# Altium PCB PCB.PcbDoc
Units mm, origin at the board's own origin, x right, y up, seen from the top; angles counter-clockwise.
Board outline 50 x 50 mm, 2 copper layers (Top Layer, Bottom Layer); 29 components, 15 nets, 81 pads, 7 vias.
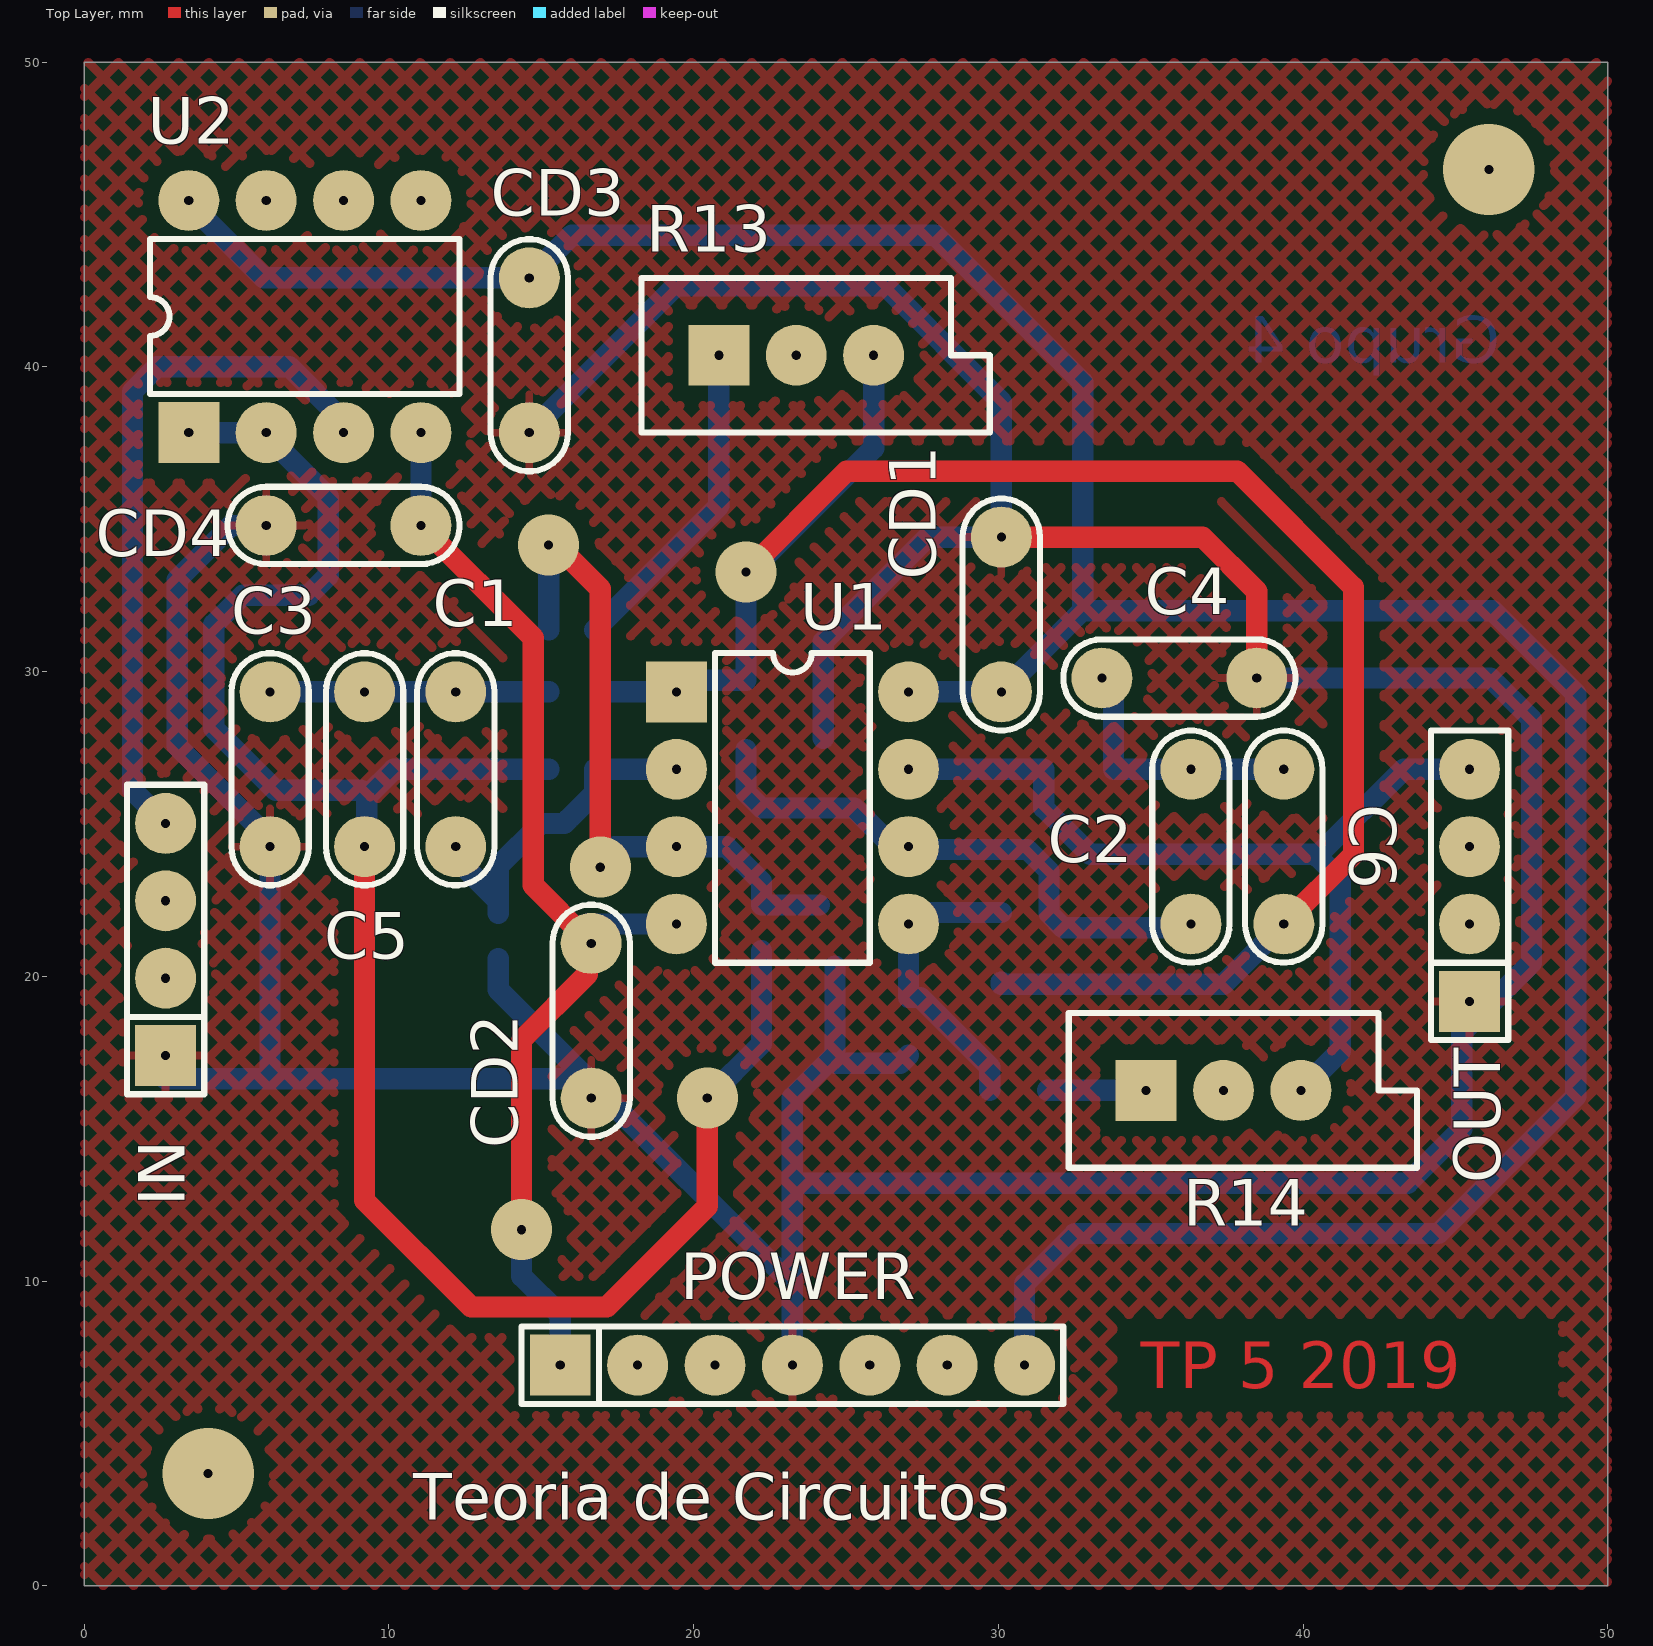
[diagram p0: Top Layer view]
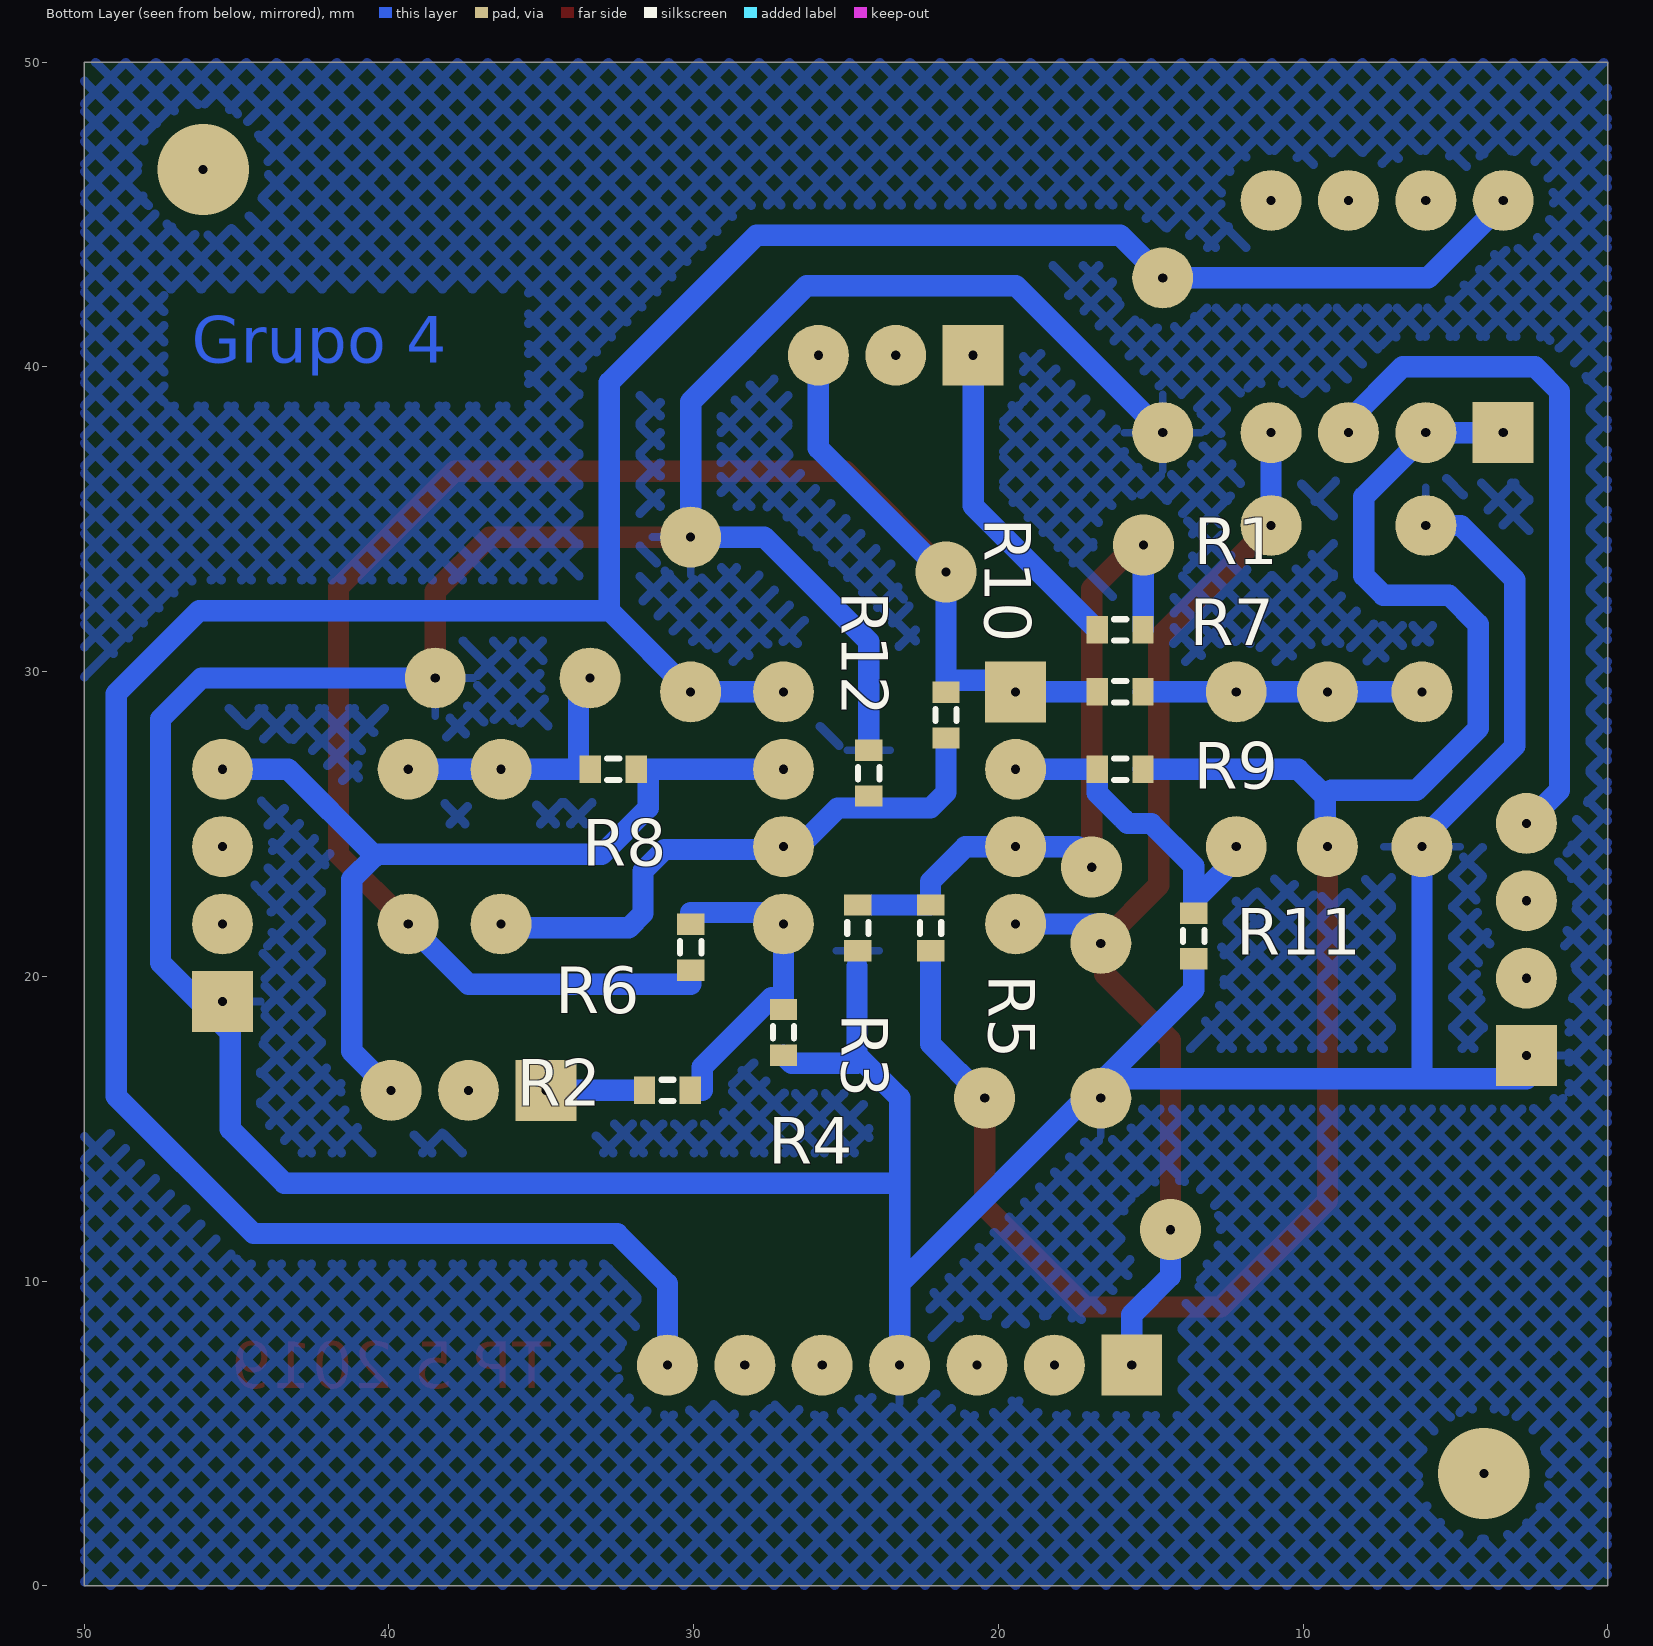
[diagram p1: Bottom Layer view, seen from below]
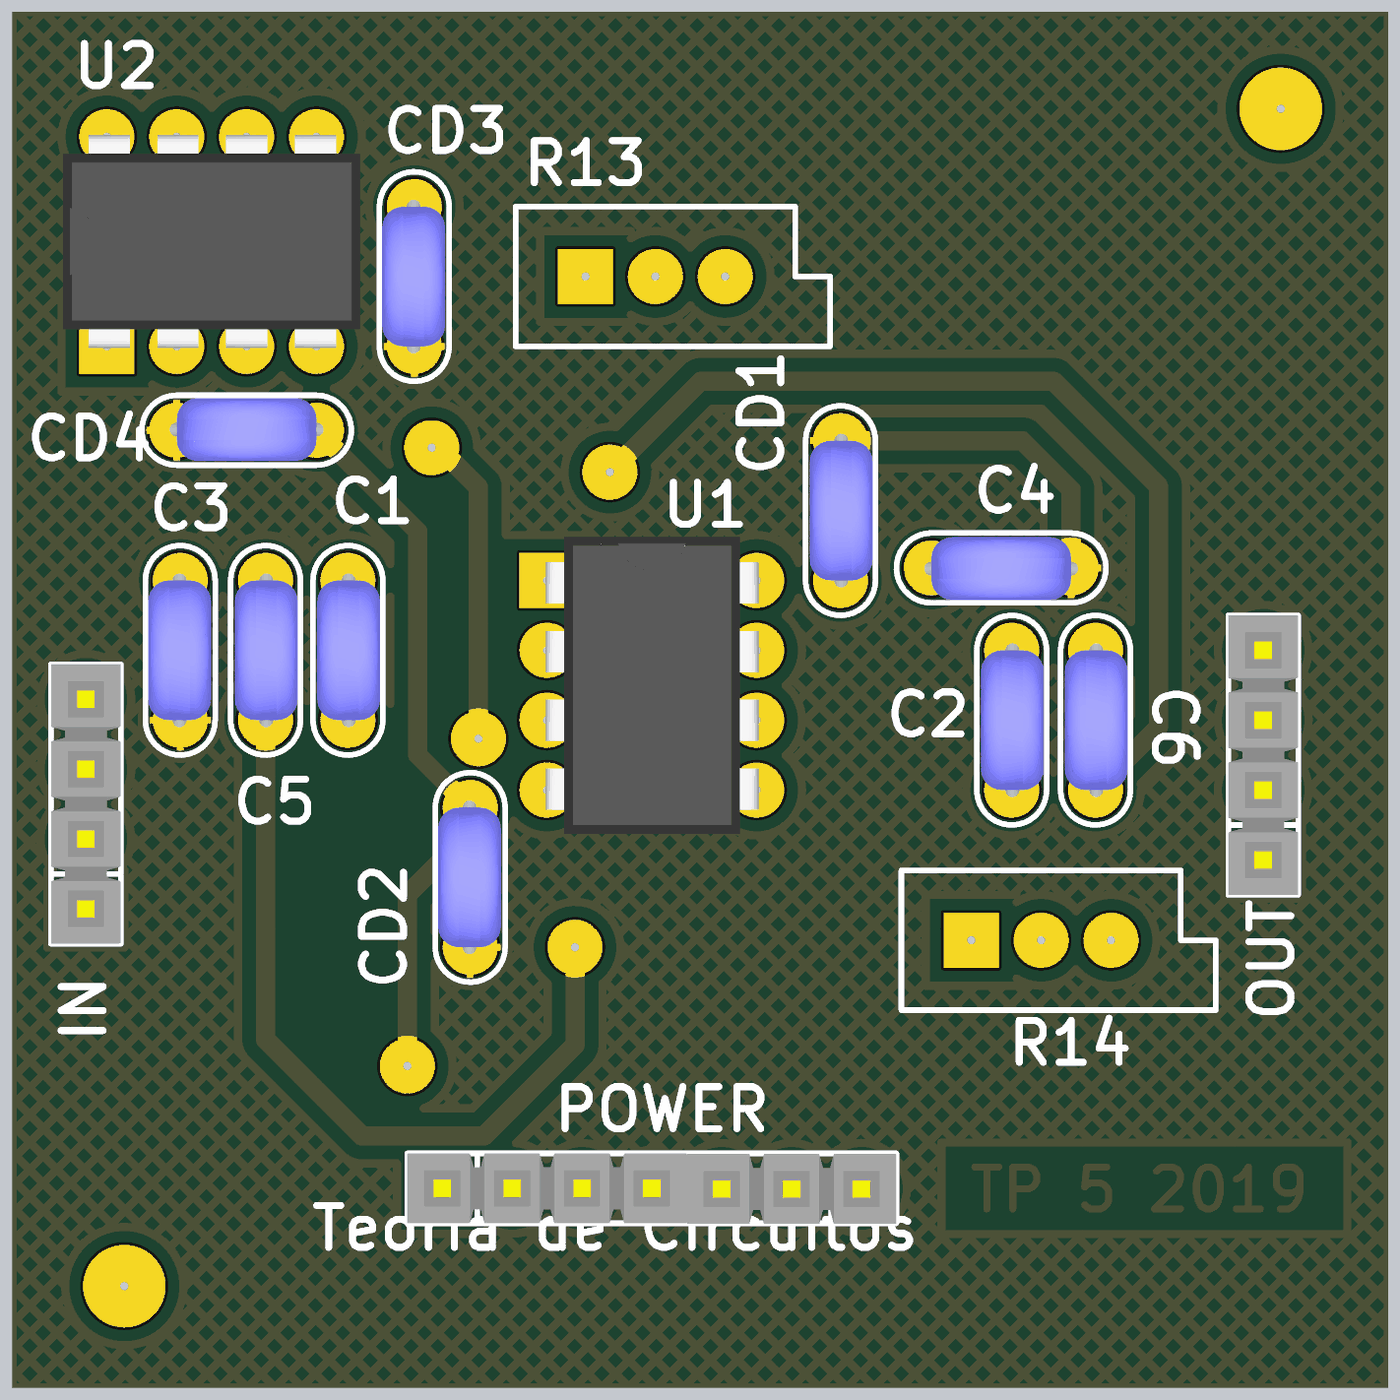
[diagram p2: 3D render of the assembled board from above, using the file's embedded part models]

## Layer stack, top to bottom
Top Solder: solder mask 0.0102, Solder Resist, Dk 3.5
Top Layer: signal copper 0.0356
Dielectric 1: dielectric 0.32, FR-4, Dk 4.8
Bottom Layer: signal copper 0.0356
Bottom Solder: solder mask 0.0102, Solder Resist, Dk 3.5

## Board outline
0,0 50,0 50,50 0,50

## Design rules (kind name [scope] priority, off if disabled: settings)
Clearance [All] p1: gap=0.5 ignorepadtopadclearanceinfootprint=FALSE
PolygonConnect [All] p1: connectstyle=Relief reliefconductorwidth=0.254 reliefentries=4 polygonreliefangle="90 Angle" airgapwidth=0.254
RoutingVias [All] p1: holewidth=0.3 width=2 viastyle="Through Hole" minholewidth=0.3 minwidth=2 maxholewidth=0.3 maxwidth=2
SolderMaskExpansion [All] p1: expansion=0.102
Width [All] p1: maxlimit=0.7 minlimit=0.7 preferedwidth=0.7 minimp=50.000000 maximp=50.000000 favimp=50.000000
30 further rules are at their usual default settings.

## Components (designator, comment, footprint, x,y, rotation, side; value= is the part's Value field where it differs from the comment)
C1 "CAP" CAP200 12.192,26.797 r90 top
C2 "CAP" CAP200 36.322,24.257 r90 top
C3 "CAP" CAP200 6.096,26.797 r270 top
C4 "CAP" CAP200 35.941,29.791 r0 top
C5 "CAP" CAP200 9.198,26.797 r90 top
C6 "CAP" CAP200 39.37,24.257 r90 top
CD1 "10n" CAP200 30.099,31.877 r90 top
CD2 "10n" CAP200 16.637,18.542 r270 top
CD3 "10n" CAP200 14.605,40.386 r270 top
CD4 "10n" CAP200 8.509,34.798 r180 top
IN "CON4" SIP4 2.667,21.209 r90 top
OUT "CON4" SIP4 45.466,22.987 r90 top
POWER "CON7" SIP7 15.621,7.239 r0 top
R1 "Res3" J1-0603 16.002,31.369 r0 bottom
R2 "Res3" J1-0603 30.861,16.256 r0 bottom
R3 "Res3" J1-0603 24.61,21.59 r90 bottom
R4 "Res3" J1-0603 27.051,18.161 r90 bottom
R5 "Res3" J1-0603 22.225,21.59 r90 bottom
R6 "Res3" J1-0603 30.099,20.955 r90 bottom
R7 "Res3" J1-0603 16.002,29.337 r0 bottom
R8 "Res3" J1-0603 32.639,26.797 r180 bottom
R9 "Res3" J1-0603 16.002,26.797 r0 bottom
R10 "Res3" J1-0603 21.717,28.575 r270 bottom
R11 "Res3" J1-0603 13.589,21.324 r90 bottom
R12 "Res3" J1-0603 24.257,26.67 r270 bottom
R13 "RPot" VR5 23.368,40.386 r0 top value=1K
R14 "RPot" VR5 37.392,16.256 r0 top value=1K
U1 "TL082" DIP8 19.431,29.337 r0 top
U2 "TL082" DIP8 3.429,37.846 r90 top

## Footprints (in the part's own frame and the unit in brackets; to place one, negate y for a bottom-side part, rotate by r counter-clockwise, add the part's x,y. Pads: shape width x height; smd on the part's side, far side on the other; paste and mask are expansions set on the pad)
CAP200 [mm]
  round 2 hole 0.3: 1(-2.54,0) 2(2.54,0)
  silkscreen extent -3.81,-1.27 3.81,1.27, body extent -2.79,-1.17 2.79,1.12, height 6.24
DIP8 [mm]
  rect 2x2 hole 0.3: 1(0,0)
  round 2 hole 0.3: 2(0,-2.54) 3(0,-5.08) 4(0,-7.62) 5(7.62,-7.62) 6(7.62,-5.08) 7(7.62,-2.54) 8(7.62,0)
  silkscreen extent 1.27,-8.89 6.35,1.27, body extent -0.06,-9.21 7.7,1.59, height 4.5
J1-0603 [mm] "Chip Resistor, Body 1.6x0.8mm, IPC High Density"
  rect 0.7x0.9 smd: 1(-0.75,0) 2(0.75,0)
  silkscreen extent -0.2,-0.35 0.2,0.35, body extent -0.85,-0.48 0.85,0.48, height 0.9
SIP4 [mm]
  rect 2x2 hole 0.3: 1(-3.81,0)
  round 2 hole 0.3: 2(-1.27,0) 3(1.27,0) 4(3.81,0)
  silkscreen extent -5.08,-1.27 5.08,1.27, body extent -5.08,-1.27 5.08,1.27, height 8.38
SIP7 [mm]
  rect 2x2 hole 0.3: 1(0,0)
  round 2 hole 0.3: 2(2.54,0) 3(5.08,0) 4(7.62,0) 5(10.16,0) 6(12.7,0) 7(15.24,0)
  silkscreen extent -1.27,-1.27 16.51,1.27, body extent -1.27,-1.3 16.51,1.27, height 8.38
VR5 [mm] "Thru-Hole; 3 Leads"
  rect 2x2 hole 0.3: 1(-2.54,0)
  round 2 hole 0.3: 2(0,0) 3(2.54,0)
  silkscreen extent -5.08,-2.54 6.35,2.54

## Part data
CD1 CD2 CD3 CD4: library part CAP
R1 R2 R3 R4 R5 R6 R7 R8 R9 R10 R11 R12: "Resistor", LatestRevisionDate=29-May-2009, LatestRevisionNote="IPC-7351 Footprint Added.", PackageDescription="Chip Resistor", PackageReference=J1-0603, Published=8-Jun-2000, Publisher="Altium Limited"
R13 R14: "Potentiometer", LatestRevisionDate=17-Jul-2002, LatestRevisionNote="Re-released for DXP Platform.", PackageDescription="Variable Resistor, Thru-Hole; 3 Leads", PackageReference=VR5, Published=8-Jun-2000, Publisher="Altium Limited", Set Position=0.5, Sim Note="Enter the Resistance value and the set point into parameter fields."
U1 U2: library part LM833, "Dual Audio Operational Amplifier"

## Via types
v1: diameter 2, hole 0.3, Top Layer to Bottom Layer, 5 vias
v2: diameter 3, hole 0.3, Top Layer to Bottom Layer, 2 vias

## Nets (pads, with @x,y where several pads share a name; then routed paths per layer and width w, separated by ;. In a path a pad name is that pad's centre, name@x,y a point inside that pad or via, vN(x,y) a via of type N, cw(c..) or ccw(c..) an arc to the next point about the centre after c; other vN are vias at no path point)
GND: C3.2 C4.2 CD1.2 CD2.2 CD3.2 CD4.2 IN.1 OUT.1 POWER.4 R3.1 R4.1 R11.1 R12.1 | length 158.9
  Top Layer w0.7: CD1.2 36.703,34.417 38.481,32.639 C4.2
  Bottom Layer w0.7: IN.1@2.667,16.637 6.096,16.637 ; CD4.2 4.826,34.798 3.046,33.018 3.046,27.561 6.096,24.511 C3.2 6.096,16.637 ; R11.1 13.589,19.558 CD2.2@16.51,16.637 ; CD3.2 19.431,42.672 26.289,42.672 30.099,38.862 CD1.2 27.686,34.417 24.257,30.988 24.257,27.813 ; POWER.4 23.241,9.906 ; 24.638,20.332 24.638,17.411 ; R4.1 26.785,17.145 24.638,17.145 24.638,17.411 ; C4.2 46.155,29.791 47.498,28.448 47.498,20.447 45.212,18.161 45.212,14.986 43.434,13.208 23.241,13.208 ; 6.096,16.637 CD2.2@16.51,16.637 ; CD2.2@16.51,16.637 23.241,9.906 ; 23.241,9.906 23.241,13.208 ; 23.241,13.208 23.241,16.014 24.638,17.411
IN: IN.4 U2.3 | length 23
  Bottom Layer w0.7: IN.4 1.579,26.107 1.579,39.198 2.386,40.005 6.731,40.005 8.509,38.227 U2.3
NetC1_1: C1.1 R9.2 R11.2 U1.2 | length 11.6
  Bottom Layer w0.7: C1.1@11.811,24.257 13.589,22.479 ; R11.2 13.589,22.479 ; 15.889,25.151 15.756,25.019 14.986,25.019 13.589,23.622 13.589,22.479 ; 15.973,25.236 16.752,26.015 R9.2 17.145,26.797 U1.2
NetC1_2: C1.2 C3.1 C5.2 R7.1 | length 9.2
  Bottom Layer w0.7: C3.1 C5.2 11.811,29.337 R7.1
NetC2_1: C2.1 R10.2 R12.2 U1.6 | length 18.7
  Bottom Layer w0.7: 21.717,27.432 21.717,26.035 22.225,25.527 24.257,25.527 25.273,25.527 26.543,24.257 U1.6 27.145,24.163 30.955,24.163 31.66,23.458 31.66,22.061 32.131,21.59 36.195,21.59 C2.1
NetC2_2: C2.2 C4.1 C6.2 R8.1 | length 8.7
  Bottom Layer w0.7: C4.1 33.782,29.41 33.782,26.797 C2.2 C6.2
NetC6_1: C6.1 R6.1 R7.2 R10.1 R13.3 U1.1 | length 61.7
  Top Layer w0.7: v1(21.717,33.274) 25.019,36.576 37.846,36.576 41.656,32.766 41.656,24.003 C6.1
  Bottom Layer w0.7: 17.145,29.337 U1.1 19.812,29.718 21.717,29.718 v1@21.717,32.766 ; v1(21.717,33.274) 21.844,33.274 25.908,37.338 R13.3 ; 30.099,19.812 30.099,19.74 37.393,19.74 C6.1
NetR1_1: R1.1 R3.2 R5.2 U1.3 | length 22.9
  Top Layer w0.7: v1@15.367,34.036 15.621,34.036 16.936,32.721 v1(16.936,23.582)
  Bottom Layer w0.7: v1(15.24,34.163) 15.24,31.381 R1.1 ; v1(16.936,23.582) 16.936,23.704 16.891,23.749 17.399,24.257 U1.3 21.082,24.257 22.225,23.114 R5.2 24.13,22.34
NetR1_2: R1.2 R13.1 | length 10.7
  Bottom Layer w0.7: R1.2 20.828,35.445 R13.1
NetR2_1: R2.1 R4.2 R6.2 U1.5 | length 10
  Bottom Layer w0.7: 29.718,16.256 29.718,17.026 27.44,19.304 27.051,19.304 U1.5 27.432,22.098 30.099,22.098
NetR2_2: R2.2 R14.1 | length 3.2
  Bottom Layer w0.7: R2.2 R14.1
OUT: OUT.4 R8.2 R14.3 U1.7 | length 30
  Bottom Layer w0.7: U1.7 31.496,26.797 31.496,25.527 33.02,24.003 40.513,24.003 ; R14.3 41.22,17.544 41.22,23.19 40.513,23.897 40.513,24.003 ; OUT.4 43.307,26.797 40.513,24.003
VCC: CD1.1 CD3.1 POWER.7 U1.8 U2.8 | length 101.2
  Bottom Layer w0.7: U2.8 3.429,45.39 5.893,42.926 CD3.1 16.002,44.323 27.94,44.323 32.766,39.497 32.766,32.004 ; U1.8 CD1.1 32.766,32.004 ; POWER.7 30.861,9.906 32.512,11.557 44.45,11.557 48.952,16.059 48.952,29.28 46.228,32.004 32.766,32.004
VEE: CD2.1 CD4.1 POWER.1 U1.4 U2.4 | length 37.4
  Top Layer w0.7: CD4.1 14.732,31.115 14.732,22.987 CD2.1@16.51,21.209 ; v1(14.351,11.684) 14.351,17.907 16.51,20.066 CD2.1@16.51,21.209 ; CD2.1 CD2.1@16.51,21.209
  Bottom Layer w0.7: CD4.1 U2.4 ; v1(14.351,11.684) 14.351,10.16 15.621,8.89 POWER.1 ; CD2.1@16.51,21.717 U1.4
VIN: C5.1 R5.1 R9.1 U2.1 U2.2 | length 64.7
  Top Layer w0.7: C5.1 9.198,12.646 12.7,9.144 17.145,9.144 20.447,12.446 v1(20.447,16.002)
  Bottom Layer w0.7: U2.1 U2.2 5.969,37.77 8.001,35.738 8.001,33.147 7.366,32.512 5.207,32.512 4.246,31.551 4.246,28.139 6.278,26.107 9.072,26.107 9.271,25.908 ; C5.1 9.271,24.33 9.271,25.908 ; R9.1 10.16,26.797 9.271,25.908 ; v1(20.447,16.002) 22.225,17.78 R5.1
pads on no net: IN.2 IN.3 OUT.2 OUT.3 POWER.2 POWER.3 POWER.5 POWER.6 R13.2 R14.2 U2.5 U2.6 U2.7
copper on no net:
  other v2: 4.064,3.683 46.101,46.482

## Polygon pours and split planes (outlines as drawn)
GND on Top Layer (hatched 45Degree grid 0.7 track 0.3, remove dead copper, pour order 0): 0,0 50,0 50,50 0,50
GND on Bottom Layer (hatched 45Degree grid 0.7 track 0.3, remove dead copper, pour order 2): 0,0 50,0 50,50 0,50

## Other copper
Top Layer:
  text "TP 5 2019" at 34.671,6.477 h1.52
Bottom Layer:
  text "Grupo 4" at 46.482,40.132 h1.52

## Silkscreen, mask and mechanical layers (free items; w line width, h text height)
Top Overlay:
  text "Teoria de Circuitos" at 10.795,2.159 h1.52